# EAGLE board new_inverter (EAGLE 9.4.0)
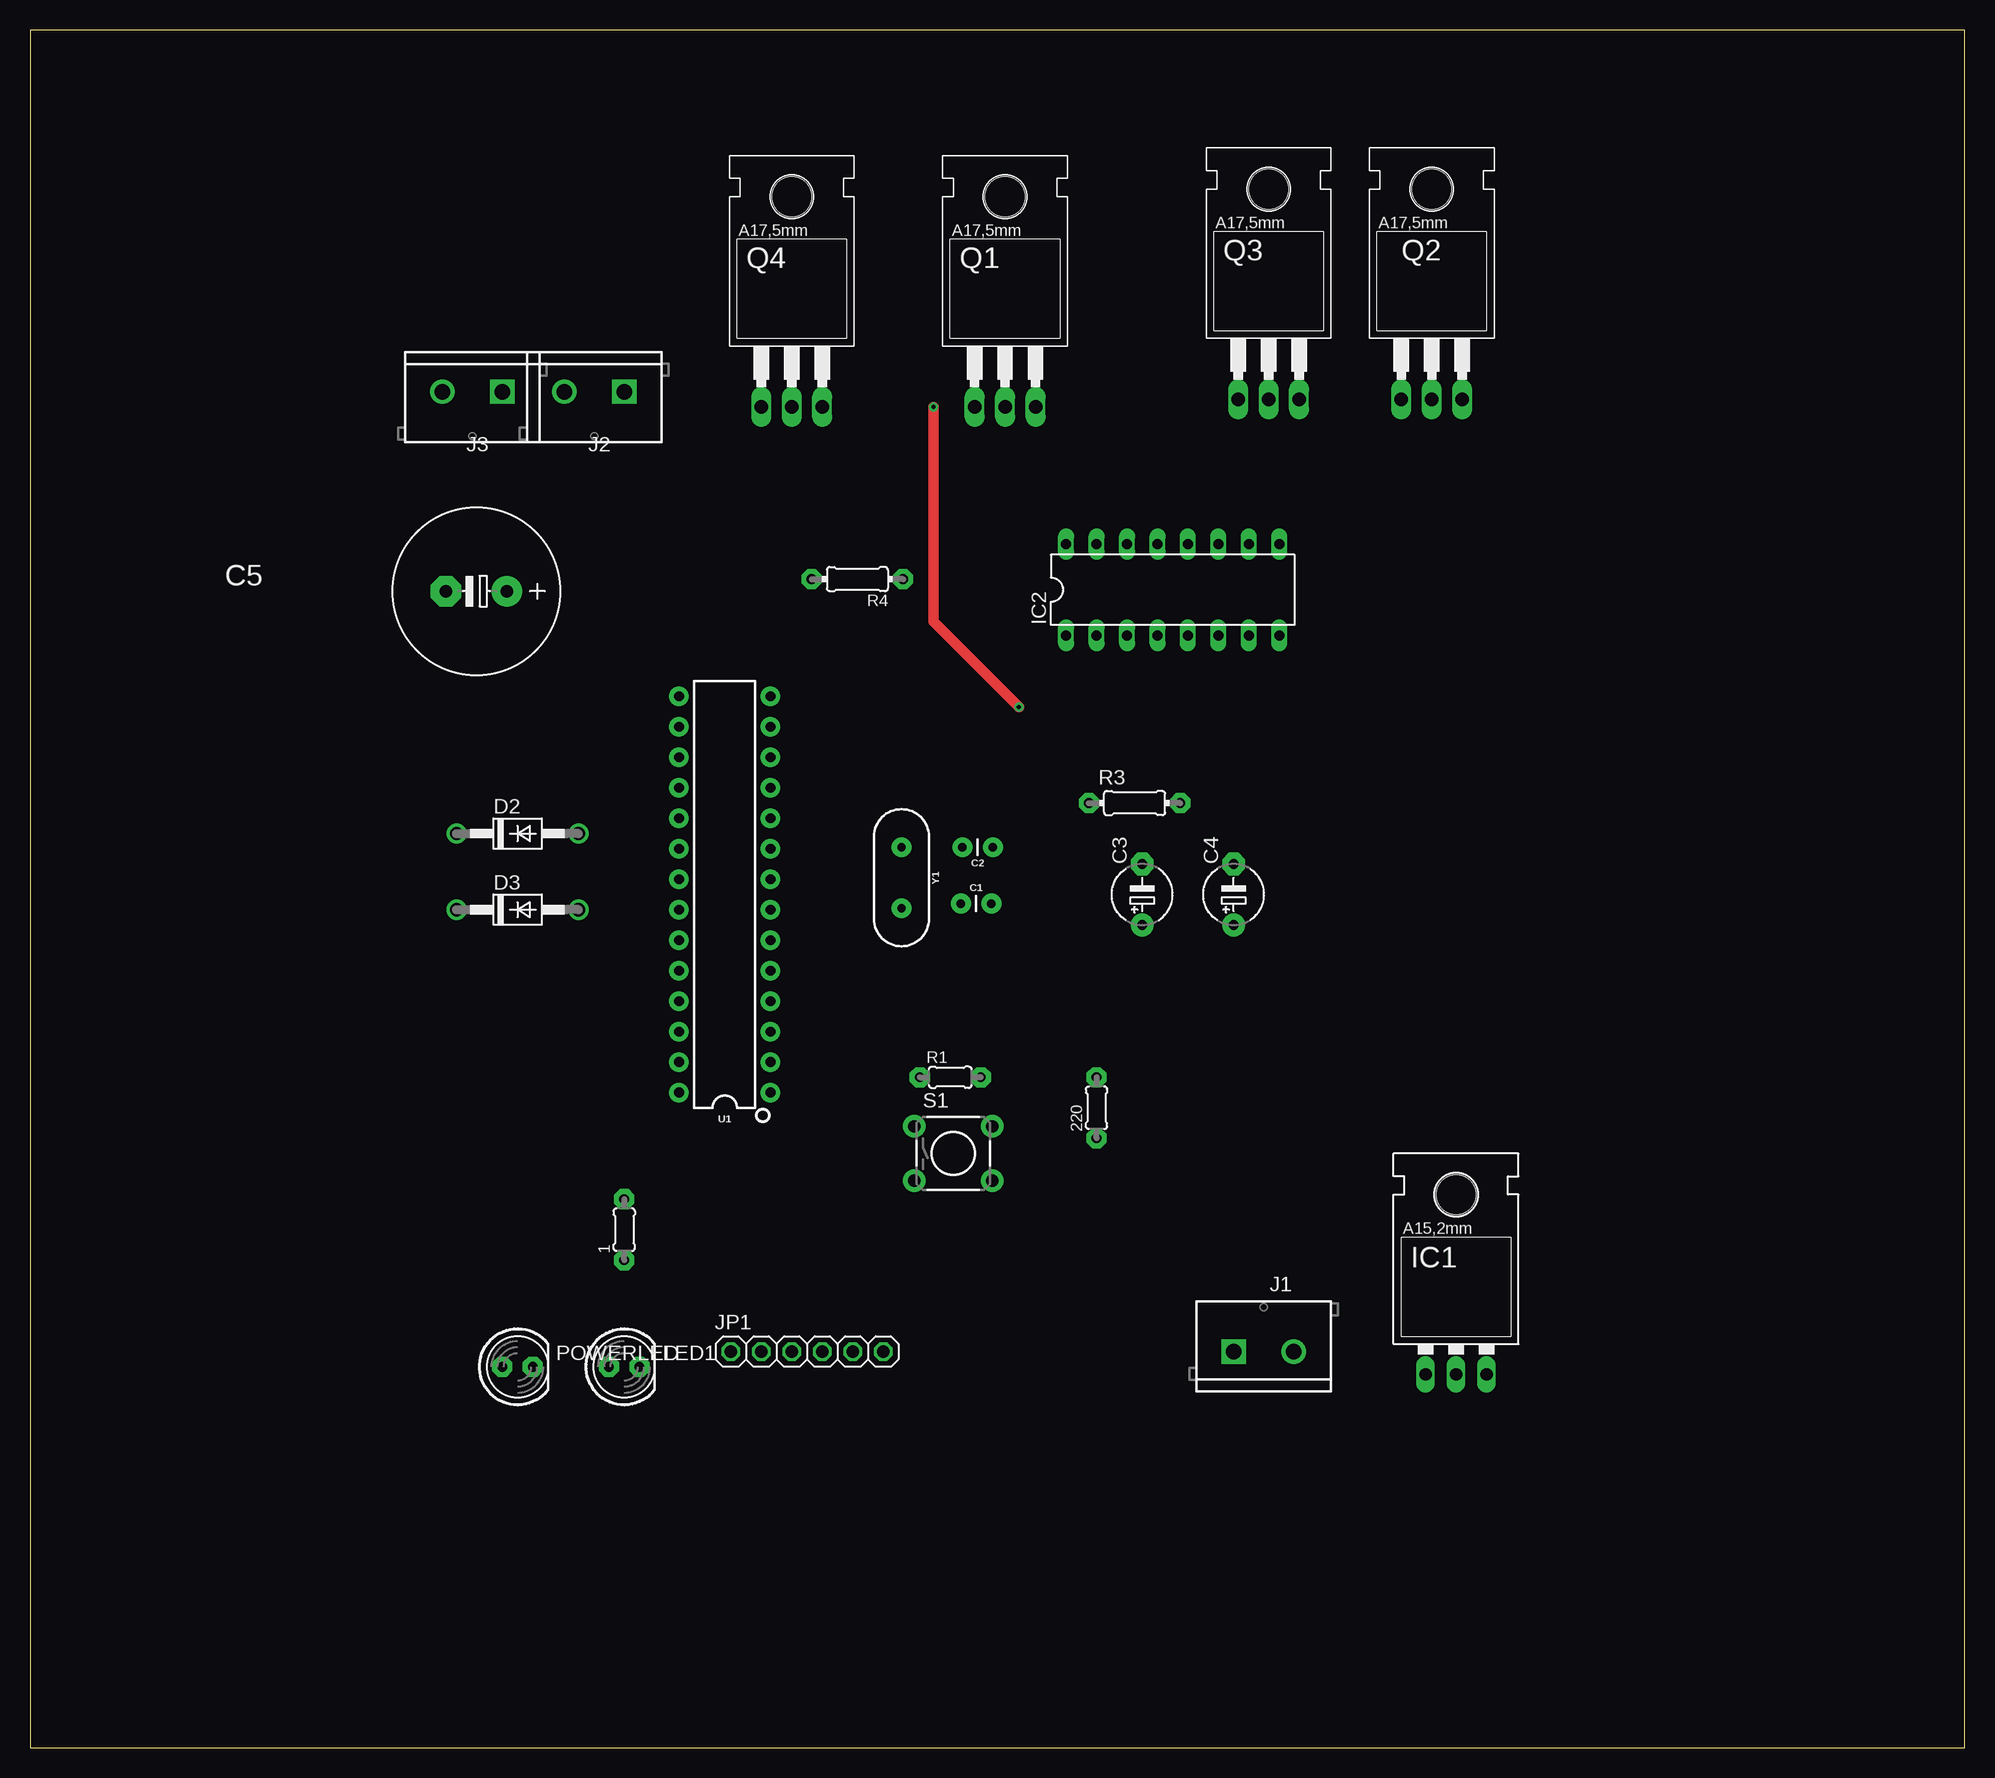
[diagram p0: board, top side]
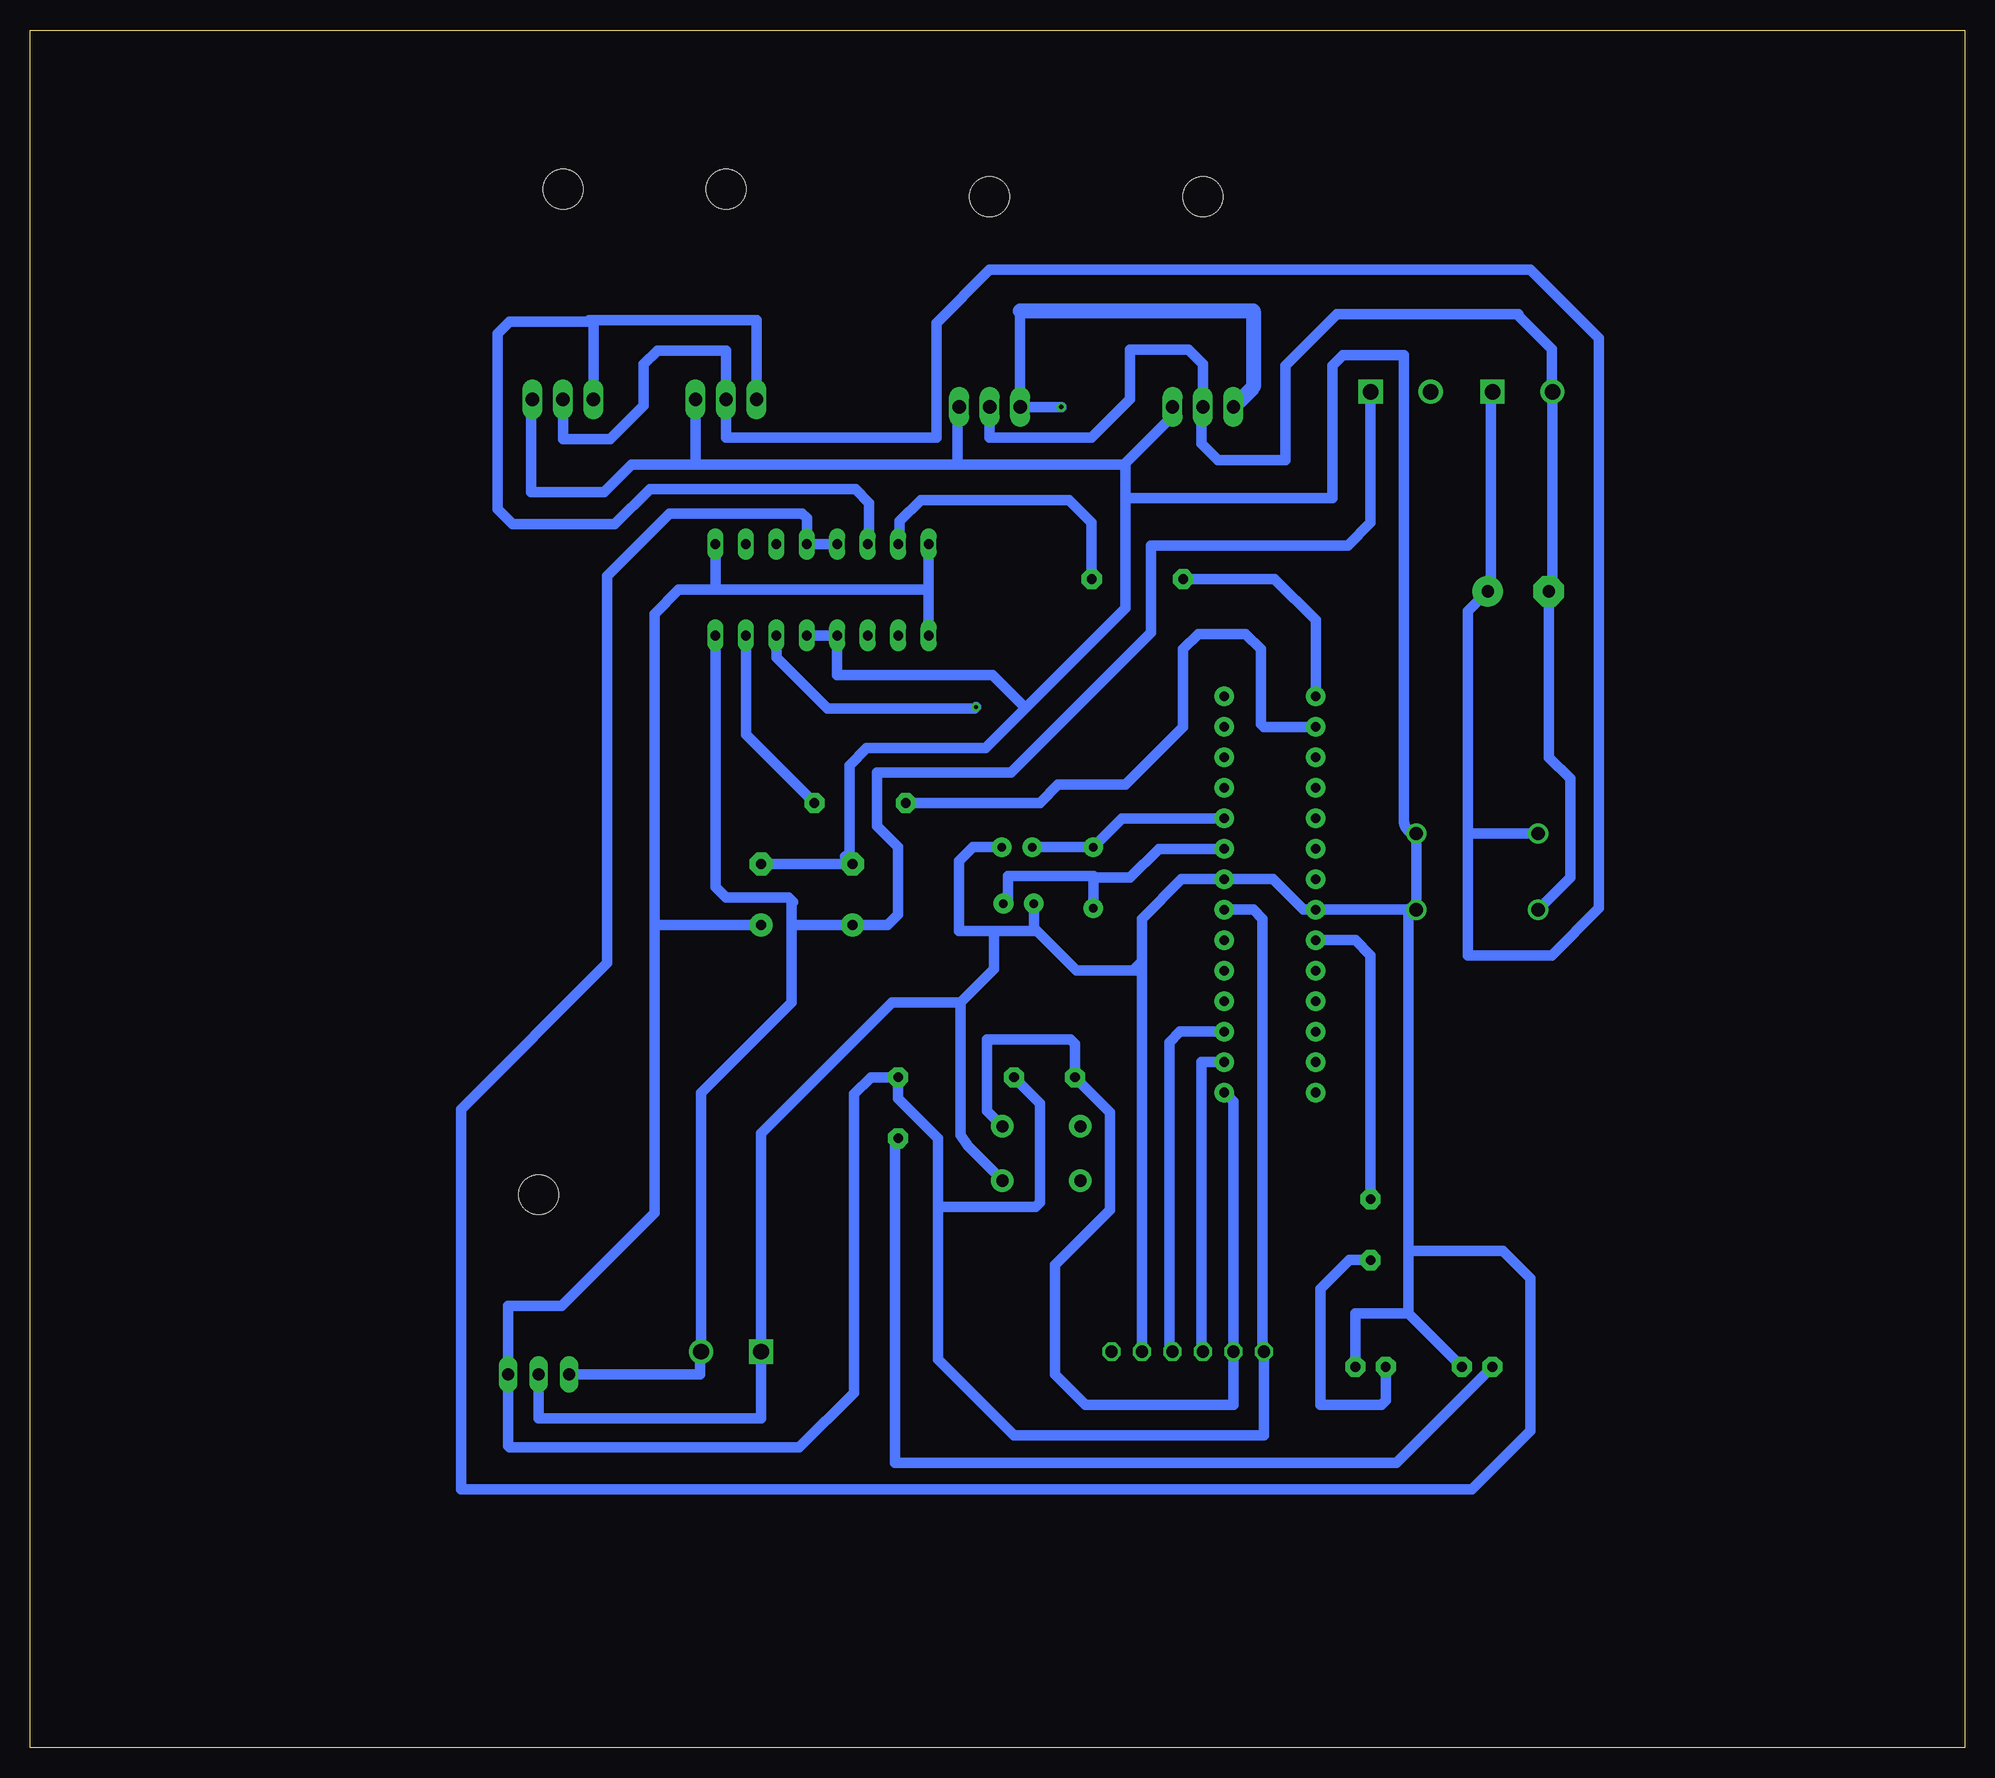
[diagram p1: board, bottom side, seen from below]

Size 161.27 x 143.18 mm. Coordinates in mm from the lower left corner, seen from the top.
Outline: 0,0 161.27,0 161.27,143.18 0,143.18 0,0
Copper layers (1*16): Top 0.035mm / dielectric 1.5mm / Bottom 0.035mm
Design rules "default *": minimum track width 35mil, minimum drill 0.35mm, track to track 10mil, track to pad 10mil, pad to pad 6mil, via to via 6mil, smd to smd 6mil, copper to edge 50mil, drill to drill 10mil, minimum pad ring 10mil, minimum via ring 8mil, stop-mask expansion 4mil, vias tented up to drill 0mil, thermal gap 10mil

## Footprints (pad centres in the part's own frame; a part is rotated, then mirrored left to right if it is on the bottom)
0204/5 = drill 0.813 pad 1.676 octagon: 1 -2.54,0; 2 2.54,0
CAP-PTH-2.54 = drill 0.7 pad 1.651: 1 -1.27,0; 2 1.27,0
E5-5 = drill 0.813 pad 1.905: + -2.54,0 | drill 0.813 pad 1.905 octagon: - 2.54,0
E5-13 = drill 1.016 pad 2.54: + -2.54,0 | drill 1.016 pad 2.54 octagon: - 2.54,0
DO41-10 = drill 1.118: A 5.08,0; C -5.08,0
78XXL = drill 1.016 long: GND 0,-3.81; IN -2.54,-3.81; OUT 2.54,-3.81 | hole 3.302: 0,11.176
DIL16 = drill 0.813 long: 1 -8.89,-3.81; 2 -6.35,-3.81; 3 -3.81,-3.81; 4 -1.27,-3.81; 5 1.27,-3.81; 6 3.81,-3.81; 7 6.35,-3.81; 8 8.89,-3.81; 9 8.89,3.81; 10 6.35,3.81; 11 3.81,3.81; 12 1.27,3.81; 13 -1.27,3.81; 14 -3.81,3.81; 15 -6.35,3.81; 16 -8.89,3.81
SCREWTERMINAL-5MM-2 = drill 1.3 pad 2.032 square: 1 0,0 | drill 1.3 pad 2.032: 2 5,0
1X06 = drill 1.016 octagon: 1 -6.35,0; 2 -3.81,0; 3 -1.27,0; 4 1.27,0; 5 3.81,0; 6 6.35,0
LED5MM = drill 0.813 pad 1.676 octagon: A -1.27,0; K 1.27,0
TO220 = drill 1.118 long: 1 -2.54,-6.35; 2 0,-6.35; 3 2.54,-6.35 | hole 3.302: 0,11.176
0204/7 = drill 0.813 pad 1.676 octagon: 1 -3.81,0; 2 3.81,0
TACTILE-PTH = drill 1.016 pad 1.88: 1 -3.251,2.261; 2 3.251,2.261; 3 -3.251,-2.261; 4 3.251,-2.261
DIP28 = drill 0.813 pad 1.626: 1 -16.51,-3.81; 2 -13.97,-3.81; 3 -11.43,-3.81; 4 -8.89,-3.81; 5 -6.35,-3.81; 6 -3.81,-3.81; 7 -1.27,-3.81; 8 1.27,-3.81; 9 3.81,-3.81; 10 6.35,-3.81; 11 8.89,-3.81; 12 11.43,-3.81; 13 13.97,-3.81; 14 16.51,-3.81; 15 16.51,3.81; 16 13.97,3.81; 17 11.43,3.81; 18 8.89,3.81; 19 6.35,3.81; 20 3.81,3.81; 21 1.27,3.81; 22 -1.27,3.81; 23 -3.81,3.81; 24 -6.35,3.81; 25 -8.89,3.81; 26 -11.43,3.81; 27 -13.97,3.81; 28 -16.51,3.81
HC49US = drill 0.7 pad 1.651: 1 -2.54,0; 2 2.54,0

## Placement (x,y rotation side)
1  220  [0204/5]  49.53,43.18 90 top
220  [0204/5]  88.9,53.34 90 top
C1  22pF  [CAP-PTH-2.54]  78.87,70.36 0 top
C2  22pF  [CAP-PTH-2.54]  78.99,75.06 180 top
C3  100uf  [E5-5]  92.71,71.12 90 top
C4  .1uf  [E5-5]  100.33,71.12 90 top
C5  [E5-13]  37.21,96.39 180 top
D2  1N4004  [DO41-10]  40.64,76.2 0 top
D3  1N4004  [DO41-10]  40.64,69.85 0 top
IC1  [78XXL]  118.87,34.92 0 top
IC2  L293D  [DIL16]  95.25,96.52 0 top
J1  [SCREWTERMINAL-5MM-2]  100.33,33.02 0 top
J2  [SCREWTERMINAL-5MM-2]  49.53,113.03 180 top
J3  [SCREWTERMINAL-5MM-2]  39.37,113.03 180 top
JP1  [1X06]  64.77,33.02 0 top
LED1  [LED5MM]  49.53,31.75 0 top
POWERLED  [LED5MM]  40.64,31.75 0 top
Q1  IRF840  [TO220]  81.28,118.11 0 top
Q2  IRF840  [TO220]  116.84,118.75 0 top
Q3  IRF840  [TO220]  103.25,118.75 0 top
Q4  IRF840  [TO220]  63.5,118.11 0 top
R1  1k  [0204/5]  76.71,55.88 0 top
R3  [0204/7]  92.07,78.74 0 top
R4  [0204/7]  68.96,97.41 180 top
S1  [TACTILE-PTH]  76.96,49.53 0 top
U1  328P  [DIP28]  57.91,71.12 90 top
Y1  16MHz  [HC49US]  72.64,72.52 270 top

## Library data of the parts
1 220 C3-C5 JP1 LED1 POWERLED R1 R3 R4 = adafruit
C1 C2 = SparkFun-Capacitors; PROD_ID: CAP-09128
D2 D3 = diode
IC1 = tango
IC2 = st-microelectronics; MPN: L293D; OC_FARNELL: 9589619; OC_NEWARK: 56P8249
J1-J3 = SparkFun-Connectors; SF_SKU: PRT-08432
Q1-Q4 = transistor-fet
S1 = SparkFun-Retired
U1 = SparkFun-IC-Microcontroller; PROD_ID: IC-09136
Y1 = SparkFun-Clocks; PROD_ID: XTAL-08181; SF_ID: COM-00536

## Nets
5V: 220.2 C4.+ IC1.OUT IC2.1 IC2.9 IC2.16 JP1.1 R1.2 U1.7
12V: C3.+ IC1.IN IC2.8 J1.2 J2.1
AC1: C5.+ D2.C J3.1 Q2.2 Q3.2
AC2: C5.- D3.C J3.2 Q1.2 Q4.2
GND: C1.1 C2.1 C3.- C4.- D2.A D3.A IC1.GND IC2.4 IC2.5 IC2.12 IC2.13 J1.1 JP1.5 LED1.K POWERLED.K Q1.3 Q2.3 Q3.3 Q4.3 S1.4 U1.8 U1.22
LED1: 1.2 U1.23
MOSFET1: R4.2 U1.15
MOSFET2: R3.1 U1.16
N$1: 220.1 POWERLED.A
N$2: C1.2 U1.9 Y1.2
N$3: C2.2 U1.10 Y1.1
N$4: IC2.14 Q2.1 Q3.1
N$5: IC2.6 Q1.1 Q4.1
N$7: IC2.7 R3.2
N$8: 1.1 LED1.A
N$9: IC2.15 R4.1
RESET: JP1.2 R1.1 S1.2 U1.1
RX: JP1.3 U1.2
TX: JP1.4 U1.3

## Tracks (layer width: path | path; a pad name or v marks a point on that pad's centre or on a via)
5V
  Bottom 0.889: R1.2 77.09,53.72 77.09,45.47 77.47,45.09 85.6,45.09 | 85.6,45.09 85.6,50.8 88.9,54.1 220.2 91.19,55.88 92.58,54.48 92.58,29.59 97.16,25.02 121.28,25.02 121.41,25.15 IC1.OUT | 85.6,45.09 85.6,32.38 79.25,26.04 58.42,26.04 JP1.1 58.55,33.15 58.55,69.09 59.31,69.85 U1.7 | IC2.16 86.36,96.52 | 121.41,33.15 IC1.OUT | 86.36,96.52 104.14,96.52 | 104.14,96.52 107.19,96.52 109.22,94.49 109.22,68.58 | 104.14,96.52 IC2.9 | 86.36,96.52 IC2.1 | IC1.OUT 121.41,36.83 116.97,36.83 109.22,44.58 109.22,68.58 | C4.+ 109.22,68.58
12V
  Bottom 0.889: IC1.IN 105.41,31.12 105.41,33.02 J1.2 105.33,54.56 97.79,62.1 97.79,68.58 | 97.79,68.58 C3.+ 89.79,68.58 88.9,69.47 88.9,75.06 90.68,76.84 90.68,81.29 79.49,81.29 67.82,92.96 67.82,100.2 51.44,100.2 49.53,102.11 J2.1 | 97.79,68.58 97.79,70.36 97.66,70.48 98.04,70.87 103.25,70.87 104.14,71.75 IC2.8
AC1
  Bottom 0.889: 41.4,76.2 41.4,94.74 C5.+ 39.5,96.65 39.5,112.9 J3.1 | D2.C 41.4,76.2 | 41.4,76.2 41.4,66.04 34.42,66.04 30.48,69.98 30.48,117.47 36.2,123.19 81.28,123.19 85.72,118.75 85.72,109.22 103.25,109.22 Q3.2 103.25,116.46 108.97,116.46 110.11,115.32 110.11,111.89 112.9,109.09 116.84,109.09 Q2.2
AC2
  Bottom 0.889: D3.C 32.89,72.52 32.89,80.77 34.67,82.55 C5.- | Q1.2 81.28,109.22 72.77,109.22 69.6,112.4 69.6,116.52 64.71,116.52 63.5,115.32 Q4.2 63.63,111.63 63.63,108.71 62.23,107.31 56.64,107.31 56.64,115.19 52.32,119.51 37.21,119.51 37.21,119.38 34.42,116.59 34.42,112.73 34.37,112.78 J3.2 34.37,96.69 C5.- | 34.67,96.65 C5.-
GND
  Bottom 0.889: IC2.13 IC2.12 96.52,102.49 96.9,102.87 107.95,102.87 113.16,97.66 113.16,65.41 125.35,53.21 125.35,21.53 41.08,21.53 36.2,26.42 36.2,39.12 38.48,41.4 46.35,41.4 | 46.35,36.2 POWERLED.K | 46.35,36.2 50.8,36.2 LED1.K | IC2.5 IC2.4 93.98,89.41 81.03,89.41 78.29,86.67 | C3.- 93.34,74.3 | C3.- C4.- | 66.17,111.89 Q4.3 66.17,111.63 66.17,110.87 69.98,107.06 | Q1.3 83.95,111.63 83.95,106.93 | 105.79,106.93 111.12,106.93 113.41,104.65 119.51,104.65 119.51,112.27 Q2.3 | 78.29,86.67 69.98,94.98 69.98,104.14 | 78.29,86.67 81.64,83.31 91.53,83.31 92.96,81.88 92.96,73.91 C3.- | IC1.GND 118.87,27.43 100.33,27.43 J1.1 100.33,51.18 89.41,62.1 83.69,62.1 | 46.35,69.85 U1.22 55.12,69.85 57.66,72.39 U1.8 65.28,72.39 68.58,69.09 68.58,65.53 | 68.58,65.53 68.58,64.64 | 68.58,64.64 JP1.5 | 69.34,64.77 68.58,65.53 | C2.1 82.68,75.06 83.82,73.91 83.82,68.07 80.9,68.07 | 77.85,68.07 77.34,68.07 74.04,64.77 69.34,64.77 | 77.85,68.07 80.9,68.07 | 80.9,68.07 80.9,64.9 83.69,62.1 | 83.69,62.1 83.69,51.09 83.1,50.15 S1.4 | 69.98,104.14 52.7,104.14 52.7,115.19 51.82,116.08 46.74,116.08 46.74,77.22 arc-90 D2.A D3.A 46.35,69.85 | 83.95,106.93 105.79,106.93 | C1.1 77.6,68.33 77.85,68.07 | 69.34,64.77 68.71,64.77 68.58,64.64 | 46.35,36.2 46.35,41.4 | 46.35,41.4 46.35,69.85 | 69.98,107.06 69.98,104.14 | 83.95,106.93 70.1,106.93 69.98,107.06 | Q3.3 105.79,106.93
LED1
  Bottom 0.889: U1.23 50.8,67.31 49.53,66.04 1.2
MOSFET1
  Bottom 0.889: R4.2 57.53,97.41 54.1,93.98 U1.15
MOSFET2
  Bottom 0.889: R3.1 77.09,78.74 75.56,80.26 69.98,80.26 65.15,85.09 65.15,91.57 63.88,92.84 59.94,92.84 58.67,91.57 58.67,85.34 58.42,85.09 U1.16
N$1
  Bottom 0.889: POWERLED.A 47.37,23.75 89.15,23.75 89.15,50.55 220.1
N$2
  Bottom 0.889: 72.64,72.52 69.6,72.52 67.18,74.93 U1.9 | Y1.2 72.64,72.52 | 72.64,72.52 72.64,72.64 79.76,72.64 79.76,70.74 C1.2
N$3
  Bottom 0.889: C2.2 Y1.1 70.23,77.47 U1.10
N$4
  Bottom 0.889: IC2.14 91.31,100.46 91.31,103.76 92.46,104.9 109.6,104.9 112.52,101.98 121.03,101.98 122.3,103.25 122.3,117.86 121.28,118.87 114.55,118.87 | Q3.1 100.71,119 114.68,119 114.55,118.87 | Q2.1 114.3,118.62 114.55,118.87
N$5  (via drill 0.35)
  Top 0.889: v82.42,86.74 75.31,93.85 v75.31,111.76
  Bottom 0.889: IC2.6 99.02,92.67 99.02,90.85 94.78,86.61 82.55,86.61 v82.42,86.74 | 78.74,119.76 Q1.1 v75.31,111.76
  Bottom 1.27: Q4.1 59.31,113.41 59.31,119.76 78.74,119.76
N$7
  Bottom 0.889: IC2.7 101.6,84.46 R3.2
N$8
  Bottom 0.889: LED1.A 48.26,28.96 48.64,28.58 53.72,28.58 53.72,38.23 51.31,40.64 1.1
N$9
  Bottom 0.889: IC2.15 88.77,100.46 88.77,102.24 87,104.01 74.68,104.01 72.77,102.11 R4.1
RESET
  Bottom 0.889: S1.2 81.48,53.06 81.48,59.05 74.55,59.05 74.17,58.67 R1.1 71.25,52.96 71.25,44.83 75.82,40.26 75.82,31.12 73.28,28.58 60.96,28.58 JP1.2 60.96,53.85 U1.1
RX
  Bottom 0.889: JP1.3 63.63,33.15 63.63,57.15 U1.2
TX
  Bottom 0.889: JP1.4 66.29,33.27 66.29,58.8 65.41,59.69 U1.3